# EAGLE board LevelShifter (EAGLE 7.1.0)
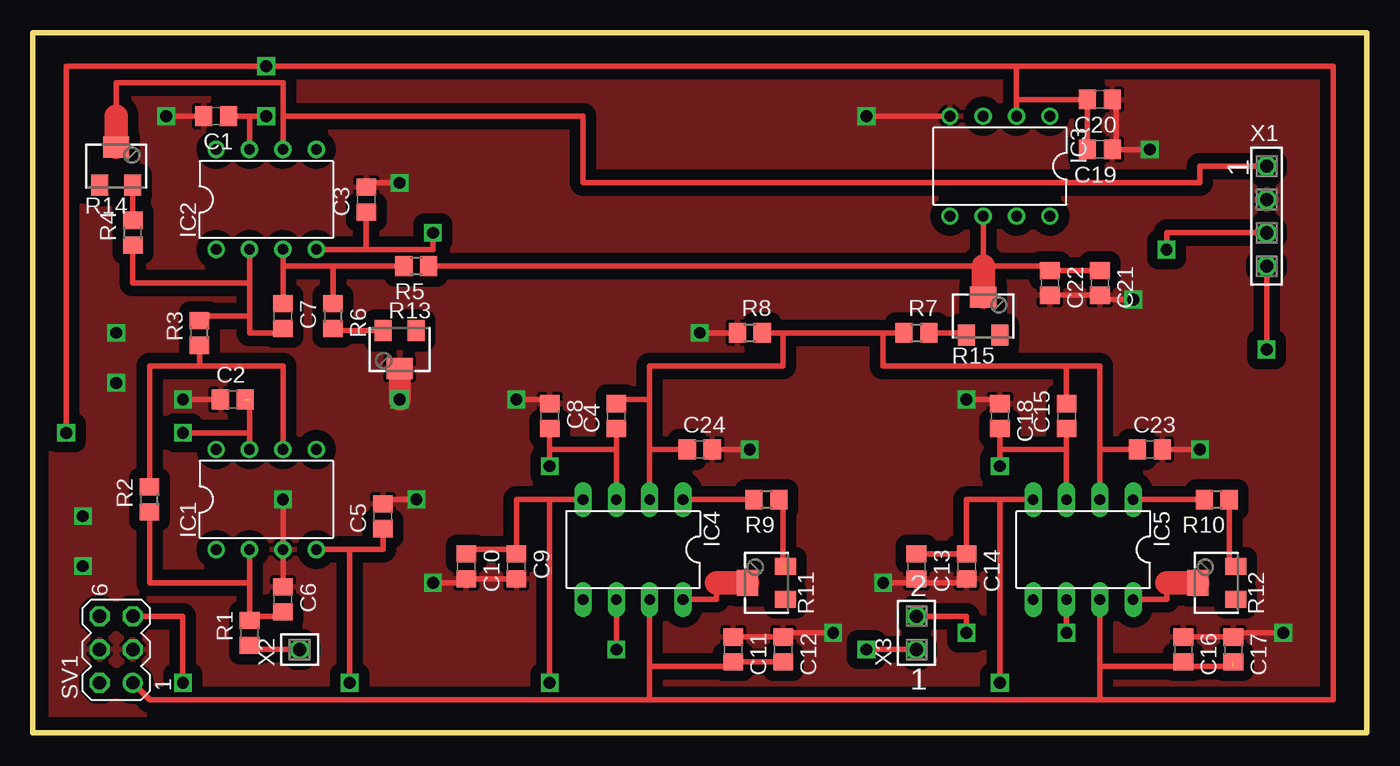
[diagram p0: board, top side]
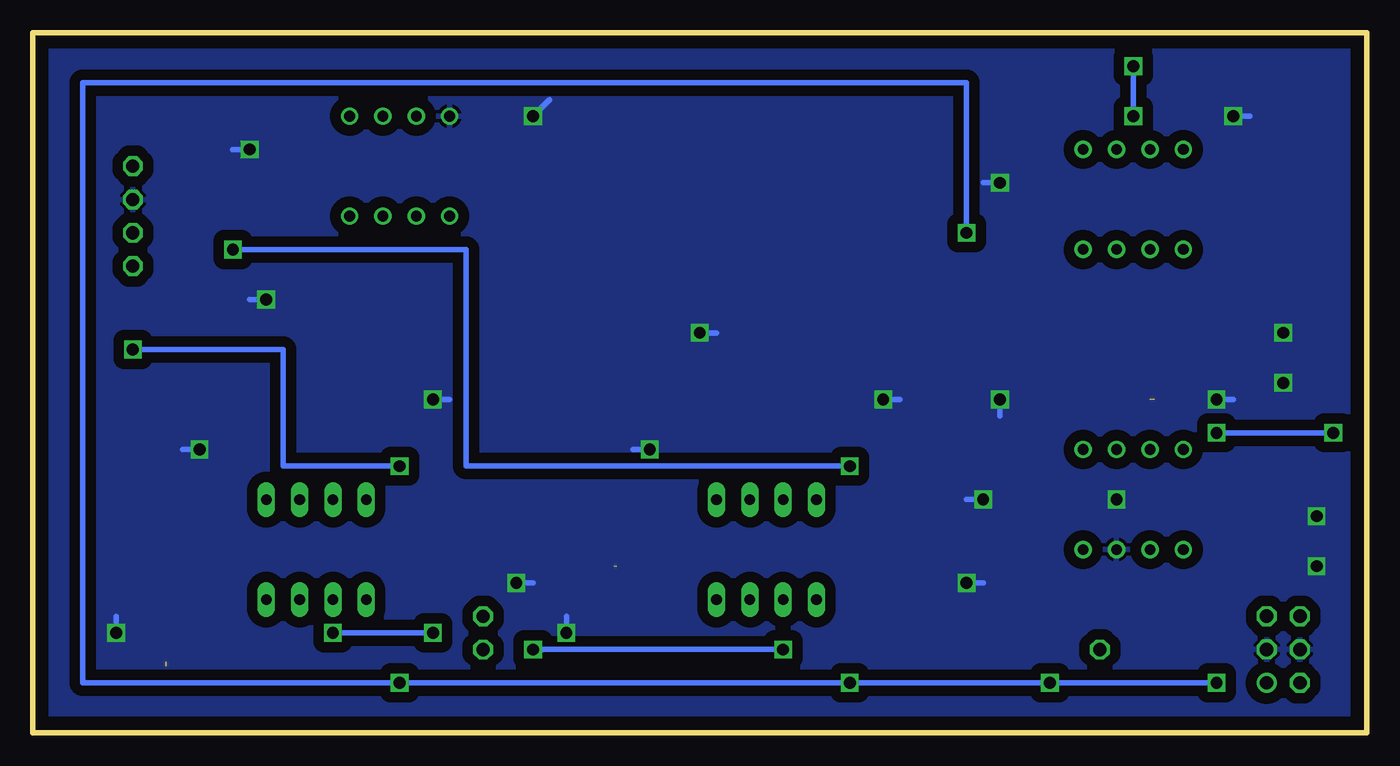
[diagram p1: board, bottom side, seen from below]

Size 101.6 x 53.34 mm. Coordinates in mm from the lower left corner, seen from the top.
Outline: 0,0 0,53.34 101.6,53.34 101.6,0 0,0
Copper layers (1*16): Top 0.035mm / dielectric 1.5mm / Bottom 0.035mm
Design rules "default": minimum track width 10mil, minimum drill 24mil, track to track 8mil, track to pad 8mil, pad to pad 8mil, via to via 8mil, smd to smd 8mil, copper to edge 40mil, drill to drill 8mil, minimum pad ring 10mil, minimum via ring 8mil, stop-mask expansion 4mil, vias tented up to drill 0mil, thermal gap 10mil

## Footprints (pad centres in the part's own frame; a part is rotated, then mirrored left to right if it is on the bottom)
C0805 = smd 1.3 x 1.5: 1 -0.95,0; 2 0.95,0
DIL08 = drill 0.813 pad 1.27: 1 -3.81,-3.81; 2 -1.27,-3.81; 3 1.27,-3.81; 4 3.81,-3.81; 5 3.81,3.81; 6 1.27,3.81; 7 -1.27,3.81; 8 -3.81,3.81
DIL08' = drill 0.813 long: 1 -3.81,-3.81; 2 -1.27,-3.81; 3 1.27,-3.81; 4 3.81,-3.81; 5 3.81,3.81; 6 1.27,3.81; 7 -1.27,3.81; 8 -3.81,3.81
R0805 = smd 1.3 x 1.5: 1 -0.95,0; 2 0.95,0
SM-42/43W = smd 1.3 x 1.6: 1 -1.27,-1.45; 3 1.27,-1.45 | smd 2 x 1.6: 2 0,1.45
MA03-2 = drill 1.016: 1 -2.54,-1.27 | drill 1.016 octagon: 2 -2.54,1.27; 3 0,-1.27; 4 0,1.27; 5 2.54,-1.27; 6 2.54,1.27
SSW-104-02-S-S = drill 1 pad 1.5 octagon: 1 -3.81,0; 2 -1.27,0; 3 1.27,0; 4 3.81,0
SSW-101-02-S-S = drill 1 pad 1.5 octagon: 1 0,0
SSW-101-02-S-D = drill 1 pad 1.5 octagon: 1 0,-1.27; 2 0,1.27

## Placement (x,y rotation side)
C1  [C0805]  13.97,46.99 180 top
C2  [C0805]  15.24,25.4 0 top
C3  [C0805]  25.4,40.64 90 top
C4  [C0805]  44.45,24.13 90 top
C5  [C0805]  26.67,16.51 90 top
C6  [C0805]  19.05,10.16 270 top
C7  [C0805]  19.05,31.75 270 top
C8  [C0805]  39.37,24.13 270 top
C9  [C0805]  36.83,12.7 270 top
C10  [C0805]  33.02,12.7 270 top
C11  [C0805]  53.34,6.35 270 top
C12  [C0805]  57.15,6.35 270 top
C13  [C0805]  67.31,12.7 270 top
C14  [C0805]  71.12,12.7 270 top
C15  [C0805]  78.74,24.13 90 top
C16  [C0805]  87.63,6.35 270 top
C17  [C0805]  91.44,6.35 270 top
C18  [C0805]  73.66,24.13 270 top
C19  [C0805]  81.28,44.45 180 top
C20  [C0805]  81.28,48.26 180 top
C21  [C0805]  81.28,34.29 270 top
C22  [C0805]  77.47,34.29 270 top
C23  [C0805]  85.09,21.59 0 top
C24  [C0805]  50.8,21.59 0 top
IC1  OP07CN  [DIL08]  17.78,17.78 0 top
IC2  OP07CN  [DIL08]  17.78,40.64 0 top
IC3  REF03Z  [DIL08]  73.66,43.18 180 top
IC4  AD620N  [DIL08']  45.72,13.97 180 top
IC5  AD620N  [DIL08']  80.01,13.97 180 top
R1  [R0805]  16.51,7.62 90 top
R2  133k  [R0805]  8.89,17.78 90 top
R3  [R0805]  12.7,30.48 90 top
R4  [R0805]  7.62,38.1 90 top
R5  [R0805]  29.21,35.56 180 top
R6  [R0805]  22.86,31.75 270 top
R7  [R0805]  67.31,30.48 0 top
R8  [R0805]  54.61,30.48 0 top
R9  [R0805]  55.88,17.78 180 top
R10  [R0805]  90.17,17.78 180 top
R11  [SM-42/43W]  55.88,11.43 90 top
R12  [SM-42/43W]  90.17,11.43 90 top
R13  [SM-42/43W]  27.94,29.21 180 top
R14  [SM-42/43W]  6.35,43.18 0 top
R15  [SM-42/43W]  72.39,31.75 0 top
SV1  [MA03-2]  6.35,6.35 90 top
X1  SSW-104-02-S-S  [SSW-104-02-S-S]  93.98,39.37 270 top
X2  SSW-101-02-S-S  [SSW-101-02-S-S]  20.32,6.35 0 top
X3  SSW-101-02-S-D  [SSW-101-02-S-D]  67.31,7.62 0 top

## Library data of the parts
C1-C24 R1-R10 = rcl
IC1-IC3 = linear
IC4 IC5 = analog-devices; MF: ALTERA CORPORATION; MPN: AD620AN; OC_FARNELL: 1523782; OC_NEWARK: 05F7108
R11-R15 = pot
SV1 = con-lstb; OC_FARNELL: unknown; OC_NEWARK: unknown
X1 = con-samtec; MPN: SSW-104-02-S-S; OC_FARNELL: unknown; OC_NEWARK: 11P9384
X2 = con-samtec; MPN: SSW-101-02-S-S; OC_FARNELL: unknown; OC_NEWARK: 11P9336
X3 = con-samtec; MPN: SSW-101-02-S-D; OC_FARNELL: unknown; OC_NEWARK: 82P1456

## Nets
+15V: C1.1 C2.2 C11.2 C12.2 C16.2 C17.2 C19.2 C20.2 IC1.7 IC2.7 IC3.2 IC4.7 IC5.7 SV1.1
-15V: C3.1 C5.1 C9.1 C10.1 C13.1 C14.1 IC1.4 IC2.4 IC4.4 IC5.4 SV1.5
GND: C1.2 C2.1 C3.2 C5.2 C6.1 C8.1 C9.2 C10.2 C11.1 C12.1 C13.2 C14.2 C16.1 C17.1 C18.1 C19.1 C20.1 C21.2 C22.2 C23.2 C24.2 IC1.3 IC3.4 R8.1 R13.2 SV1.3 SV1.4 X1.2
N$1: C6.2 IC1.2 R1.2 R2.1
N$2: C4.1 C8.2 IC4.3 X1.3
N$3: IC1.6 R2.2 R3.1
N$5: C7.2 IC2.2 R3.2 R4.1
N$6: C7.1 IC2.3 R5.2 R6.1
N$7: C21.1 C22.1 IC3.6 R5.1 R15.2
N$9: IC4.8 R11.2
N$10: R9.1 R11.3
N$11: IC4.1 R9.2
N$12: IC5.1 R10.2
N$14: R7.2 R15.1
N$15: IC5.8 R12.2
N$16: C15.1 C18.2 IC5.3 X1.4
N$18: C4.2 C15.2 C23.1 C24.1 IC4.2 IC5.2 R7.1 R8.2
N$21: R10.1 R12.3
N$22: R4.2 R14.3
N$23: R6.2 R13.3
N$24: R1.1 X2.1
N$25: IC4.6 X3.1
N$26: IC5.6 X3.2
N$27: IC2.6 R14.2 X1.1

## Tracks (layer width: path | path; a pad name or v marks a point on that pad's centre or on a via)
+15V  (via drill 0.9)  (2 unrouted)
  Top 0.406: IC5.7 81.28,5.08 | IC1.7 16.51,22.86 | IC2.7 16.51,46.99 C1.1 v17.78,46.99 | SV1.1 8.89,2.54 46.99,2.54 | 46.99,2.54 81.28,2.54 | 81.28,2.54 99.06,2.54 99.06,50.8 74.93,50.8 | 74.93,50.8 v17.78,50.8 2.54,50.8 v2.54,22.86 | IC4.7 46.99,5.08 | 46.99,5.08 46.99,2.54 | C16.2 87.31,5.08 | 87.31,5.08 81.28,5.08 | 91.44,5.08 87.31,5.08 | 81.28,5.08 81.28,2.54 | IC3.2 74.93,48.26 | 16.51,25.4 16.51,22.86 | 16.51,22.86 v11.43,22.86 | C12.2 C11.2 53.02,5.08 46.99,5.08 | 74.93,48.26 C20.2 C19.2 | 74.93,48.26 74.93,50.8
  Bottom 0.406: v17.78,46.99 v17.78,50.8 | v11.43,22.86 v2.54,22.86
-15V  (via drill 0.9)
  Top 0.406: 73.66,17.78 71.12,17.78 C14.1 C13.1 | 39.37,17.78 36.83,17.78 36.83,13.97 | 36.83,13.97 C9.1 | C10.1 33.34,13.97 36.83,13.97 | IC1.4 24.13,13.97 | C5.1 26.67,13.97 24.13,13.97 | C3.1 25.4,36.83 IC2.4 30.48,36.83 v30.48,38.1 | SV1.5 11.43,8.89 v11.43,3.81 | IC4.4 39.37,17.78 | 39.37,17.78 v39.37,3.81 | IC5.4 73.66,17.78 | 73.66,17.78 v73.66,3.81 | 24.13,13.97 v24.13,3.81
  Bottom 0.406: v11.43,3.81 v24.13,3.81 v39.37,3.81 v73.66,3.81 97.79,3.81 97.79,49.53 30.48,49.53 v30.48,38.1
GND  (via drill 0.9)
  Top 0.406: C16.1 C17.1 91.44,7.62 v95.25,7.62 | C13.2 66.99,11.43 v64.77,11.43 | C14.2 70.8,11.43 67.31,11.43 | C18.1 73.34,25.4 v71.12,25.4 | C11.1 53.34,7.62 53.66,7.3 C12.1 57.15,7.62 v60.96,7.62 | C8.1 39.05,25.4 v36.83,25.4 | C5.2 26.99,17.78 v29.21,17.78 | C6.1 IC1.3 v19.05,17.78 | C2.1 v11.43,25.4 | C3.2 25.72,41.91 v27.94,41.91 | C1.2 v10.16,46.99 | R8.1 v50.8,30.48 | C22.2 C21.2 81.6,33.02 v83.82,33.02 | IC3.4 v63.5,46.99 | C9.2 C10.2 32.7,11.43 v30.48,11.43 | C24.2 v54.61,21.59 | C23.2 v88.9,21.59 | C20.1 82.55,47.94 82.55,44.45 v85.09,44.45
  Top 1.676: R13.2 v27.94,25.4
  Bottom 0.406: v95.25,7.62 95.25,8.89 | v64.77,11.43 63.5,11.43 | v71.12,25.4 69.85,25.4 | v60.96,7.62 60.96,8.89 | v36.83,25.4 35.56,25.4 | v29.21,17.78 30.48,17.78 | v11.43,25.4 10.16,25.4 | v27.94,25.4 27.94,24.13 | v27.94,41.91 29.21,41.91 | v10.16,46.99 8.89,46.99 | v50.8,30.48 49.53,30.48 | v83.82,33.02 85.09,33.02 | v63.5,46.99 62.23,48.26 | v30.48,11.43 29.21,11.43 | v88.9,21.59 90.17,21.59 | v85.09,44.45 86.36,44.45 | v54.61,21.59 55.88,21.59
  other vias: 6.35,30.48 3.81,12.7 3.81,16.51 6.35,26.67
  pour Bottom (isolate 0.813): -3.81,55.88 105.41,55.88 105.41,-3.81 -3.81,-5.08
  pour Top (isolate 0.813): -6.35,59.69 109.22,59.69 109.22,-11.43 -6.35,-11.43
N$1
  Top 0.406: IC1.2 16.51,11.43 | R2.1 8.89,11.43 16.51,11.43 | 16.51,11.43 16.51,8.89 | C6.2 18.73,8.89 16.51,8.89 | 16.51,8.89 R1.2
N$2  (via drill 0.9)
  Top 0.406: IC4.3 44.45,21.59 | C8.2 39.37,21.59 | C4.1 44.45,21.59 | 44.45,21.59 39.37,21.59 | 39.37,21.59 v39.37,20.32 | v86.36,36.83 86.36,38.1 X1.3
  Bottom 0.406: v39.37,20.32 68.58,20.32 68.58,36.83 v86.36,36.83
N$3
  Top 0.406: IC1.6 19.05,27.94 12.7,27.94 | R2.2 8.89,27.94 12.7,27.94 | R3.1 12.7,27.94
N$5
  Top 0.406: R3.2 13.02,31.75 16.51,31.75 | 16.51,31.75 16.51,34.29 | 16.51,34.29 IC2.2 | 16.51,31.75 16.51,30.48 18.73,30.48 C7.2 | R4.1 7.62,34.29 16.51,34.29
N$6
  Top 0.406: IC2.3 19.05,35.56 | 19.05,35.56 C7.1 | R5.2 22.86,35.56 | 22.86,35.56 19.05,35.56 | R6.1 22.86,35.56
N$7
  Top 0.406: C21.1 C22.1 77.15,35.56 72.39,35.56 | IC3.6 72.39,35.56 | 72.39,35.56 R5.1
  Top 1.778: 72.39,35.56 R15.2
N$9
  Top 0.406: R11.2 54.61,11.43 | IC4.8 52.07,10.16 52.07,11.43
  Top 1.778: R11.2 52.07,11.43
N$10  (1 unrouted)
  Top 0.406: R9.1 57.15,17.78 57.15,12.7
N$11
  Top 0.406: IC4.1 R9.2
N$12
  Top 0.406: IC5.1 R10.2
N$14
  Top 0.406: R15.1 70.94,30.48 R7.2
N$15
  Top 0.406: IC5.8 86.36,10.16 86.36,11.43
  Top 1.778: R12.2 86.36,11.43
N$16  (via drill 0.9)
  Top 0.406: C15.1 78.74,21.59 | 78.74,21.59 IC5.3 | 73.66,21.59 78.74,21.59 | C18.2 73.66,21.59 | 73.66,21.59 v73.66,20.32 | v93.98,29.21 X1.4
  Bottom 0.406: v73.66,20.32 82.55,20.32 82.55,29.21 v93.98,29.21
N$18
  Top 0.406: R7.1 64.77,30.48 | 64.77,30.48 57.15,30.48 | 57.15,30.48 R8.2 | 78.74,27.94 81.28,27.94 81.28,21.59 | 78.74,27.94 64.77,27.94 64.77,30.48 | IC4.2 46.99,21.59 | 46.99,21.59 46.99,25.4 | 46.99,25.4 46.99,27.94 57.15,27.94 57.15,30.48 | IC5.2 81.28,21.59 | C15.2 78.74,27.94 | C23.1 81.28,21.59 | C24.1 46.99,21.59 | C4.2 44.77,25.4 46.99,25.4
N$21
  Top 0.406: R10.1 91.12,12.7 R12.3
N$22
  Top 0.406: R4.2 R14.3
N$23
  Top 0.406: R6.2 23,30.66 R13.3
N$24
  Top 0.406: R1.1 16.83,6.35 X2.1
N$25  (via drill 0.9)
  Top 0.406: IC4.6 v44.45,6.35 | v63.5,6.35 X3.1
  Bottom 0.406: v44.45,6.35 v63.5,6.35
N$26  (via drill 0.9)
  Top 0.406: IC5.6 v78.74,7.62 | v71.12,7.62 71.12,8.89 X3.2
  Bottom 0.406: v78.74,7.62 v71.12,7.62
N$27
  Top 0.406: 6.35,46.99 6.35,49.53 19.05,49.53 19.05,46.99 | IC2.6 19.05,46.99 | 19.05,46.99 41.91,46.99 41.91,41.91 88.9,41.91 88.9,43.18 X1.1
  Top 1.778: R14.2 6.35,46.99